# Altium PCB PCB1.PcbDoc
Units mm, origin at the board's own origin, x right, y up, seen from the top; angles counter-clockwise.
Board outline 70 x 45 mm, 2 copper layers (Top Layer, Bottom Layer); 17 components, 11 nets, 80 pads, 2 vias.
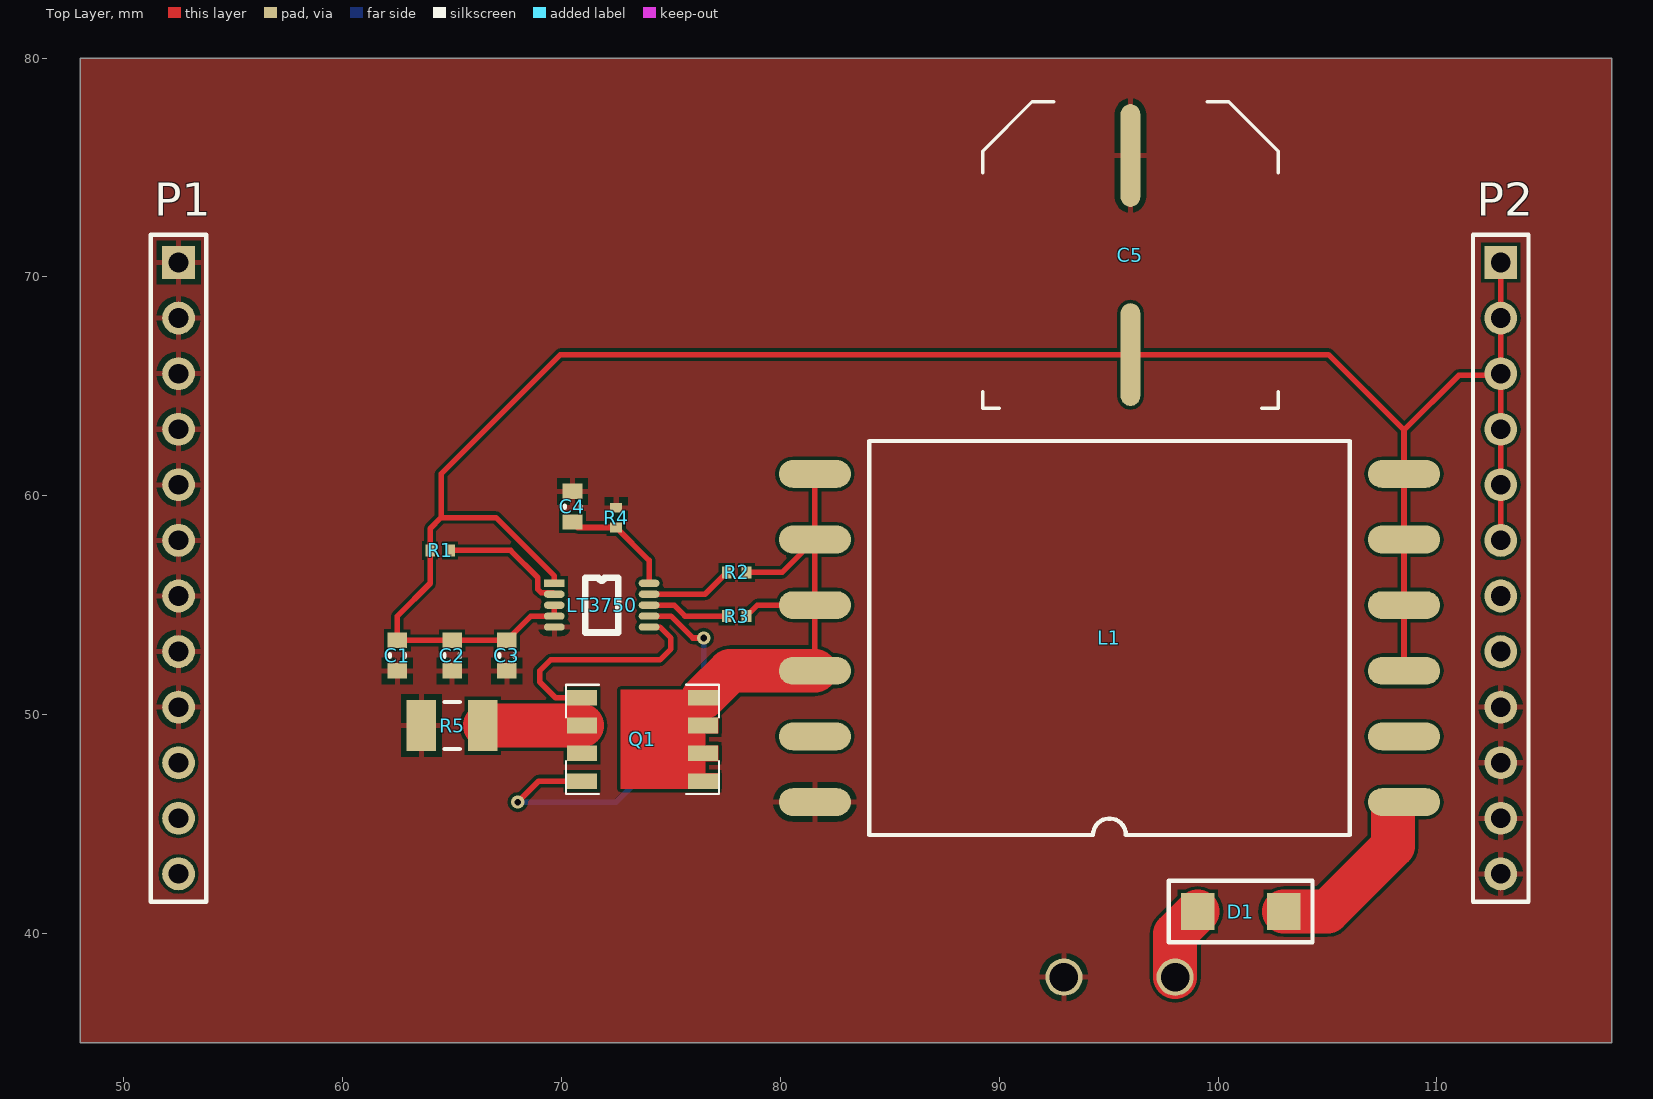
[diagram p0: Top Layer view]
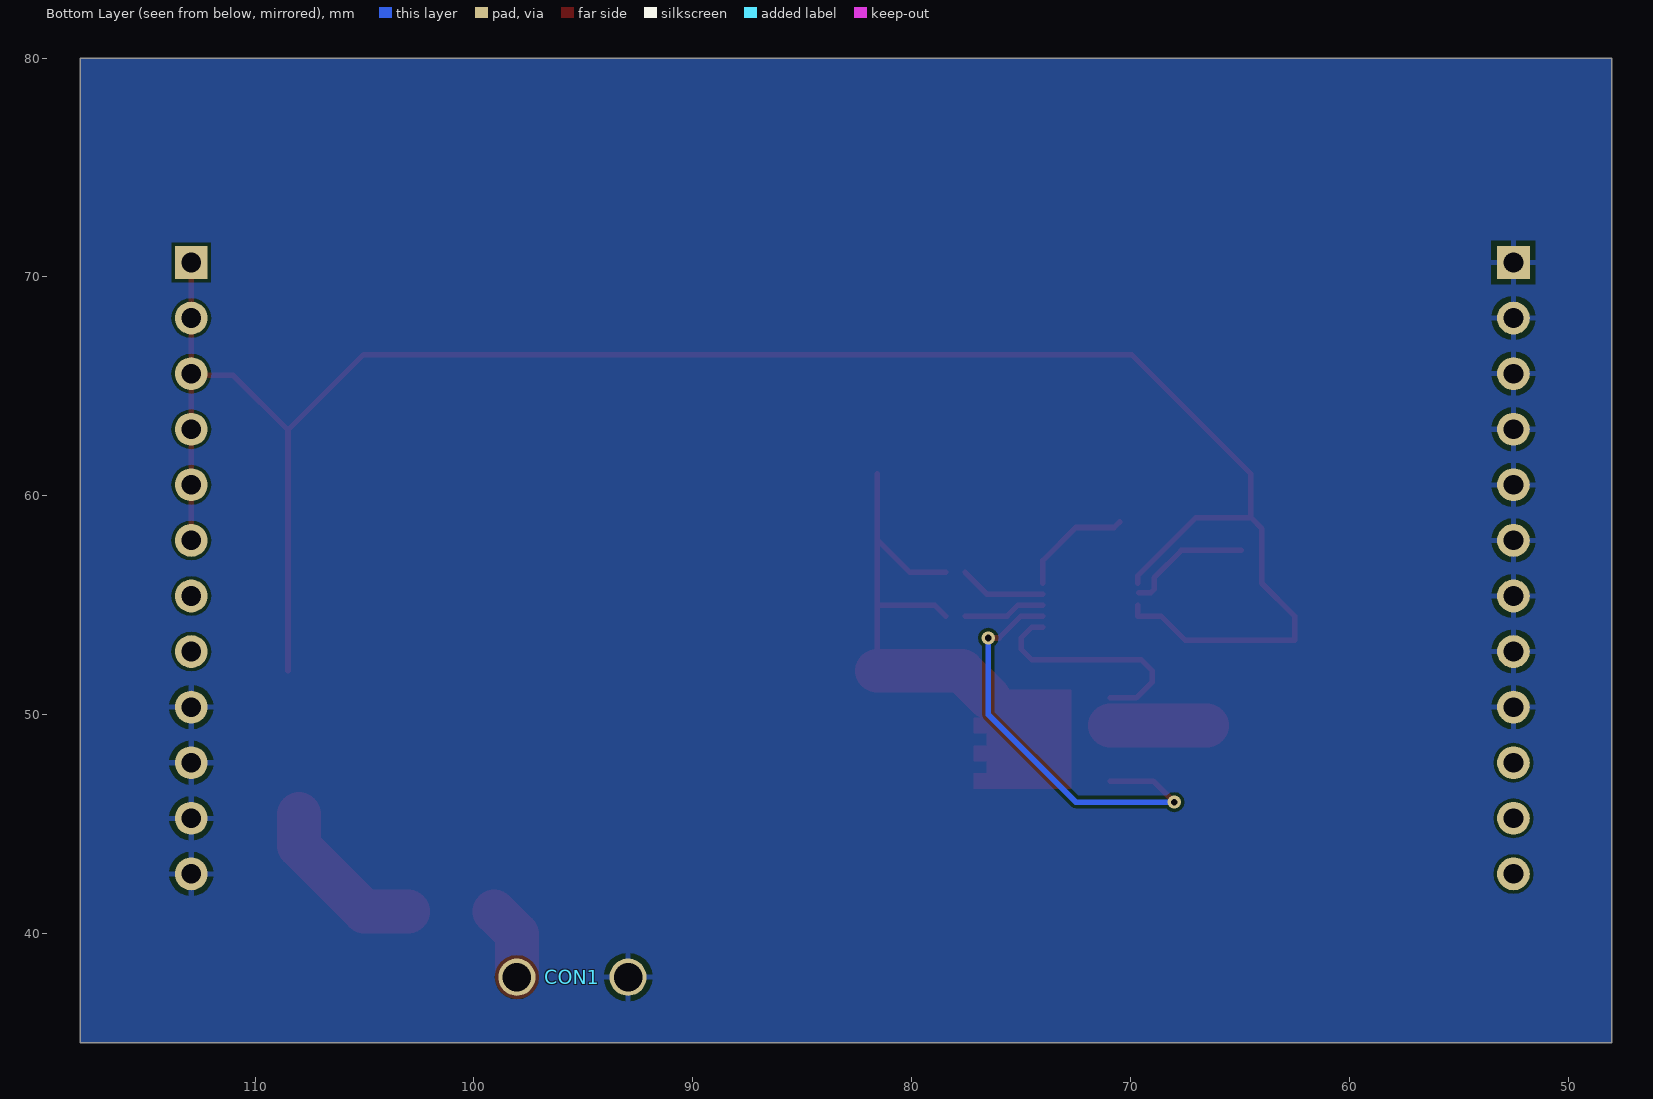
[diagram p1: Bottom Layer view, seen from below]

## Layer stack, top to bottom
Top Solder: solder mask 0.0102, Solder Resist, Dk 3.5
Top Layer: signal copper 0.0356
Dielectric 1: dielectric 0.32, FR-4, Dk 4.8
Bottom Layer: signal copper 0.0356
Bottom Solder: solder mask 0.0102, Solder Resist, Dk 3.5

## Board outline
48,35 48,80 118,80 118,35

## Design rules (kind name [scope] priority, off if disabled: settings)
Clearance [All] p1: gap=0.15 ignorepadtopadclearanceinfootprint=TRUE except(0: Arc-Hole Track-Hole SMDPad-Hole THPad-Hole Via-Hole Fill-Hole Poly-Hole Region-Hole Text-Hole)
PlaneClearance [All] p1: clearance=0.5
PolygonConnect [All] p1: connectstyle=Relief reliefconductorwidth=0.254 reliefentries=4 polygonreliefangle="90 Angle" airgapwidth=0.254
RoutingVias [All] p1: holewidth=0.711 width=1.27 viastyle="Through Hole" minholewidth=0.711 minwidth=1.27 maxholewidth=0.711 maxwidth=1.27
SolderMaskExpansion [All] p1: expansion=0.05
Width [All] p1: maxlimit=0.254 minlimit=0.254 preferedwidth=0.254
29 further rules are at their usual default settings.

## Components (designator, comment, footprint, x,y, rotation, side; value= is the part's Value field where it differs from the comment)
C1 "10uF" CAPC0603(1608)55_L 62.5,52.7 r270 top
C2 "10uF" CAPC0603(1608)55_L 65,52.7 r270 top
C3 "10uF" CAPC0603(1608)55_L 67.5,52.7 r270 top
C4 "100pF" CAPC0603(1608)55_L 70.5,59.5 r270 top
C5 "100uF" PCBComponent#1 96,71 r180 top
CON1 "OSTTA024163" "Term Block 2P" 95.5,38 r180 bottom
D1 "ES3J" Diode 101.035,41 r0 top
L1 "DA2034 Transformer" "DA2034 Transformer" 108.5,46 r180 top
LT3750 "LT3750" LT3750 69.67,56 r0 top
P1 "Header 12" HDR1X12 52.5,70.66 r270 top
P2 "Header 12" HDR1X12 112.92,70.66 r270 top
Q1 "CSD18540Q5BT" PCBComponent#2 73.7,48.865 r180 top
R1 "100K" 0402-RES-HD 64.45,57.5 r0 top value=100k
R2 "33K" 0402-RES-HD 78,56.5 r0 top
R3 "42K2" 0402-RES-HD 78,54.5 r180 top value=42.2K
R4 "2K2" 0402-RES-HD 72.5,59 r90 top value=2.2K
R5 "15m" RES-1206 65,49.5 r180 top

## Footprints (in the part's own frame and the unit in brackets; to place one, negate y for a bottom-side part, rotate by r counter-clockwise, add the part's x,y. Pads: shape width x height; smd on the part's side, far side on the other; paste and mask are expansions set on the pad)
0402-RES-HD [mm] "Chip Resistor, Body 1.0x0.5mm, IPC High Density"
  rect 0.45x0.55 smd: 1(-0.45,0) 2(0.45,0)
  body extent -0.52,-0.27 0.53,0.28, height 0.4
CAPC0603(1608)55_L [mm] "Chip Capacitor, Body 1.6x0.8mm, Height 0.55mm, IPC High Density"
  rect 0.7x0.9 smd: 1(-0.7,0) 2(0.7,0)
  silkscreen extent -0.05,-0.35 0.05,0.35, body extent -0.87,-0.47 0.88,0.48, height 0.55
"DA2034 Transformer" [mm]
  oval 3.3x1.27 smd: 1(0,0) 2(0,-3) 3(0,-6) 4(0,-9) 5(0,-12) 6(0,-15) 7(26.92,-15) 8(26.92,-12) 9(26.92,-9) 10(26.92,-6) 11(26.92,-3) 12(26.92,0)
  silkscreen extent 2.48,-16.5 24.44,1.5
Diode [mm]
  rect 1.52x1.68 smd: D1+(-1.965,0) D1-(1.965,0)
  silkscreen extent -3.28,-1.4 3.28,1.4
HDR1X12 [mm] "Connector; Header; 12 Position"
  rect 1.5x1.5 hole 0.9: 1(0,0)
  round 1.5 hole 0.9: 2(2.54,0) 3(5.08,0) 4(7.62,0) 5(10.16,0) 6(12.7,0) 7(15.24,0) 8(17.78,0) 9(20.32,0) 10(22.86,0) 11(25.4,0) 12(27.94,0)
  silkscreen extent -1.27,-1.27 29.21,1.27
LT3750 [mm]
  rect 0.95x0.33 smd: 1(0,0)
  oval 0.95x0.33 smd: 2(0,-0.5) 3(0,-1) 4(0,-1.5) 5(0,-2) 6(4.33,-2) 7(4.33,-1.5) 8(4.33,-1) 9(4.33,-0.5) 10(4.33,0)
  silkscreen extent 1.41,-2.25 2.92,0.25
PCBComponent#1 [mm]
  oval 0.9x4.7 smd: 1(0,4.55) 2(0,-4.55)
  silkscreen extent -6.75,-7 6.75,7, body extent -6.73,-6.9 6.77,6.9, height 13.5
PCBComponent#2 [mm]
  rect 1.372x0.711 smd: 1(2.769,-1.905) 2(2.769,-0.635) 3(2.769,0.635) 4(2.769,1.905) 5(-2.769,1.905) 6(-2.769,0.635) 7(-2.769,-0.635) 8(-2.769,-1.905)
  Top Layer region: -3.454,2.261 0.991,2.261 0.991,-2.261 -3.454,-2.261 -3.454,-1.549 -2.87,-1.549 -2.87,-0.991 -3.454,-0.991 -3.454,-0.279 -2.87,-0.279 -2.87,0.279 -3.454,0.279 -3.454,0.991 -2.87,0.991 -2.87,1.549 -3.454,1.549
  silkscreen extent -3.5,-2.5 3.5,2.5, body extent -3.28,-2.53 2.72,2.47, height 1.1
RES-1206 [mm]
  rect 1.35x2.35 smd: 1(-1.4,0) 2(1.4,0)
  silkscreen extent -0.35,-1.08 0.35,1.07, body extent -1.73,-0.67 1.73,0.67, height 0.45
"Term Block 2P" [mm]
  round 1.7 hole 1.3: 1(-2.54,0) 2(2.54,0)
  body extent -5.64,-3.1 4.96,4.5, height 10

## Part data
C1 C2 C3: library part C0603-10uF-16V-1, "CAP CER 10UF 16V X5R 0603", Part No=EMK107BBJ106MA-T, Cod EMS=05.281.019.592
C4: library part CC0603--1, "CAP CER 100PF 50V NP0 0603", Part No=GRM1885C1H101JA01D
C5: library part CA-100uF-3, "CAP ALUM 100UF 20% 80V SMD"
CON1: library part "Term Block 2P", "2 Position Wire to Board Terminal Block Horizontal with Board 0.200\" (5.08mm) Through Hole"
D1: library part Diode
P1 P2: "Header, 12-Pin", LatestRevisionDate=17-Jul-2002, LatestRevisionNote="Re-released for DXP Platform.", Publisher="Altium Limited"
Q1: library part CSD18540Q5BT-1, "MOSFET N-CH 60V 100A 8VSON", Part No=CSD18540Q5BT
R1: library part R0402-100K-11, "RES 100K OHM 1/10W 1% 0402 SMD 1", Part No=ERJ-2GEJ104X, Cod EMS=05.280.029.504, Family=ERJ-2GE....X, Family Description="RESISTOR FILME ESPESSO 0R-1M / 1/10W / 5% /  0402. P/N: ERJ-2GE....X – PANASONIC ELECTRONIC COMPONENTS."
R2: library part R0402-33K-7, "RES 33K OHM 1/10W 1% 0402 SMD", Part No=ERJ-2RKF3302X, Cod EMS=05.280.029.535, Family=ERJ-2RKF....X, Family Description="RESISTOR FILME ESPESSO 10R-1M / 1/10W / 1% / 0402. P/N: ERJ-2RKF....X – PANASONIC ELECTRONIC COMPONENTS."
R3: library part R0402-42K2-1, "RES 42.2K OHM 1/10W 1% 0402 SMD", Part No=ERJ-2RKF4222X
R4: library part R0402-2K2-5, "RES 2.2K OHM 1/10W 1% 0402 SMD", Part No=ERJ-2RKF2201X, Cod EMS=05.280.029.541, Family=ERJ-2RKF....X, Family Description="RESISTOR FILME ESPESSO 10R-1M / 1/10W / 1% / 0402. P/N: ERJ-2RKF....X – PANASONIC ELECTRONIC COMPONENTS."
R5: library part Res2, "RES 15m OHM 1W 1% 1210 SMD", LatestRevisionDate=17-Jul-2002, LatestRevisionNote="Re-released for DXP Platform.", PackageDescription="Axial Device, Thru-Hole; 2 Leads; 0.4 in Pin Spacing", PackageReference=AXIAL-0.4, Published=8-Jun-2000, Publisher="Altium Limited"

## Free pads (board coordinates)
  round 0 on Mech16 paste+0 mask+0: 1(82.5,67) 1(84,67.5)

## Via types
v1: diameter 0.6, hole 0.3, Top Layer to Bottom Layer, 2 vias

## Nets (pads, with @x,y where several pads share a name; then routed paths per layer and width w, separated by ;. In a path a pad name is that pad's centre, name@x,y a point inside that pad or via, vN(x,y) a via of type N, cw(c..) or ccw(c..) an arc to the next point about the centre after c; other vN are vias at no path point)
GND: C1.2 C2.2 C3.2 C4.1 C5.2 CON1.2 L1.12 LT3750.5 P1.1 P1.2 P1.3 P1.4 P1.5 P1.6 P1.7 P1.8 P1.9 P2.9 P2.10 P2.11 P2.12 R4.2 R5.2
NetC4_2: C4.2 LT3750.10 R4.1 | length 5.3
  Top Layer w0.254: C4.2 70.75,58.55 R4.1 74,57.05 LT3750.10
NetCON1_1: CON1.1 D1.D1+ | length 3.4
  Top Layer w2: CON1.1 98.04,39.97 D1.D1+
NetD1_D1-: D1.D1- L1.1 | length 7.7
  Top Layer w2: D1.D1- 105,41 108,44 L1.1@108,45.46
NetL1_7: L1.7 L1.8 L1.9 L1.10 Q1.5 Q1.6 Q1.7 Q1.8 R2.2 R3.1 | length 21.7
  Top Layer w0.254: R3.1 78.95,55 L1.9 ; R2.2 80.08,56.5 L1.8 ; L1.10 L1.9 ; L1.7 L1.8 ; L1.9 L1.8
  Top Layer w2: Q1.8 77.699,52 L1.10
NetLT3750_2: LT3750.2 R1.2 | length 5.8
  Top Layer w0.254: R1.2@64.95,57.5 67.67,57.5 68.918,56.252 68.918,55.72 69.08,55.558 LT3750.2@69.612,55.558
NetLT3750_6: LT3750.6 Q1.1 Q1.2 Q1.3 R5.1 | length 15.6
  Top Layer w0.254: R5.1@66.365,49.365 66.5,49.5 R5.1 ; Q1.1 69.73,50.77 69,51.5 69,52 69.5,52.5 74.5,52.5 75,53 75,53.5 74.5,54 LT3750.6
  Top Layer w2: R5.1@66.5,49.5 Q1.2
NetLT3750_7: LT3750.7 Q1.4 | length 19.9
  Top Layer w0.254: v1(68,46) 68.96,46.96 Q1.4 ; LT3750.7 75,54.5 76,53.5 v1(76.5,53.5)
  Bottom Layer w0.254: v1(68,46) 72.5,46 76.5,50 v1(76.5,53.5)
NetLT3750_8: LT3750.8 R3.2 | length 3.8
  Top Layer w0.254: LT3750.8 75.143,55 75.643,54.5 R3.2
NetLT3750_9: LT3750.9 R2.1 | length 4
  Top Layer w0.254: LT3750.9 76.55,55.5 R2.1
VCC: C1.1 C2.1 C3.1 C5.1 L1.3 L1.4 L1.5 L1.6 LT3750.1 LT3750.3 LT3750.4 P2.1 P2.2 P2.3 P2.4 P2.5 P2.6 R1.1 | length 100
  Top Layer w0.254: LT3750.3 LT3750.4 68.6,54.5 C3.1 C2.1 C1.1 62.5,54.5 64,56 R1.1 64,58.5 64.5,59 ; LT3750.1 69.67,56.33 67,59 64.5,59 ; L1.3 L1.4 L1.5 L1.6 108.5,63 ; P2.6 P2.5 P2.4 P2.3 ; P2.1 P2.2 P2.3 ; 64.5,59 64.5,61 69.95,66.45 C5.1 105.05,66.45 108.5,63 ; 108.5,63 111,65.5 112.84,65.5 P2.3
pads on no net: L1.2 L1.11 P1.10 P1.11 P1.12 P2.7 P2.8

## Polygon pours and split planes (outlines as drawn)
GND on Top Layer "GND Top" (solid, pour order 0): 48,35 48,80 118,80 118,35
GND on Bottom Layer "GND Bottom" (solid, pour order 1): 48,35 48,80 118,80 118,35